# EAGLE board answer (EAGLE 7.4.0)

Size 52 x 34 mm. Coordinates in mm from the lower left corner, seen from the top.
Outline: 0,0 52,0 52,34 32,34 32,28 20,28 20,34 0,34 0,0
Copper layers used: 
Holes 3 mm at 6,6 46,6 46,28 6,28

## Footprints (pad centres in the part's own frame; a part is rotated, then mirrored left to right if it is on the bottom)
R0805 = smd 1 x 1.3: 1 -1,0; 2 1,0

## Placement (x,y rotation side)
R1  10k  [R0805]  16,14 0 top
R2  10k  [R0805]  26,14 90 top
R3  10k  [R0805]  36,14 0 top

## Library data of the parts
R1-R3 = synth

## Text on the board
tPlace: FAB-EDGE